# Altium PCB pay-motors-prototype.PcbDoc (part 2 of 2)
Units mm, origin at the board's own origin, x right, y up, seen from the top; angles counter-clockwise.
Board outline 81 x 46.01 mm, 4 copper layers (Top Layer, GND, PWR, Bottom Layer), stack 0.778 mm thick; 77 components, 99 nets, 310 pads, 335 vias.
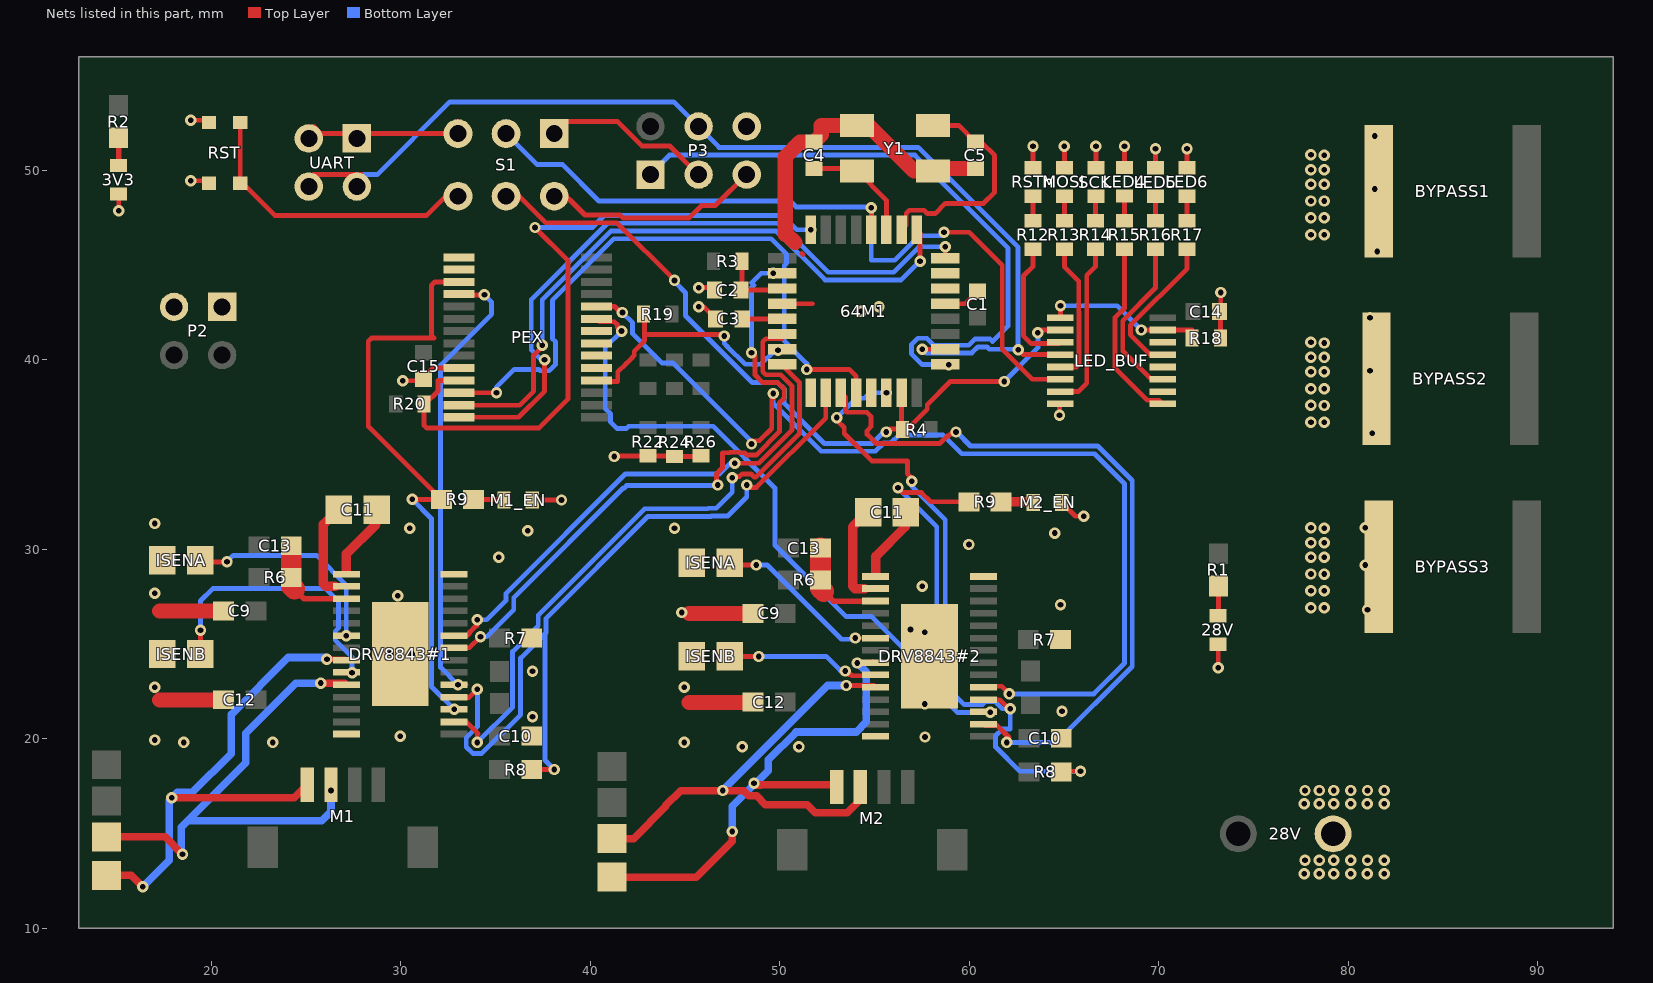
[diagram p4: the nets of this part, all layers, seen from the top]

## Via types
v1: diameter 0.6, hole 0.3, Top Layer to Bottom Layer, tented both sides, 334 vias
v2: diameter 0.6, hole 0.3, Top Layer to Bottom Layer, tented top, 1 vias

## Nets (pads, with @x,y where several pads share a name; then routed paths per layer and width w, separated by ;. In a path a pad name is that pad's centre, name@x,y a point inside that pad or via, vN(x,y) a via of type N, cw(c..) or ccw(c..) an arc to the next point about the centre after c; other vN are vias at no path point) (continued)
BIN1_DRV8843N1: 64M1.18 DRV8843#1.22 | length 34
  Top Layer w0.254: DRV8843#1.22@32.817,24.808 33.625,24.808 v1(34.211,25.394) ; v1(46.736,33.401) 46.665,33.472 46.665,33.985 46.983,34.303 46.983,35.102 47.364,35.102 47.385,35.123 47.865,35.123 47.886,35.102 48.152,35.102 48.274,34.981 48.754,34.981 49.987,36.214 49.987,37.738 50.236,37.987 50.236,38.467 49.896,38.807 49.099,38.807 48.698,39.209 48.698,40.202 v1(48.514,40.386)
  Bottom Layer w0.254: v1(34.211,25.394) 34.538,25.394 35.966,26.822 35.966,27.455 41.756,33.244 41.812,33.244 41.91,33.342 41.91,33.376 46.562,33.376 46.609,33.329 46.681,33.401 v1(46.736,33.401) ; v1(48.514,40.386) 48.514,43.815 48.641,43.942 48.514,44.069 49.022,44.577 v1(49.657,44.577)
BIN2_DRV8843N1: 64M1.22 DRV8843#1.23 | length 29.9
  Top Layer w0.254: DRV8843#1.23@32.817,25.443 33.497,25.443 33.632,25.578 33.632,25.634 33.971,25.974 34.028,25.974 34.036,25.982 v1(34.036,26.289) ; v1(47.625,34.544) 48.892,34.544 50.643,36.295 50.643,38.635 50.065,39.214 49.268,39.214 49.104,39.377 49.104,40.159 49.113,40.168 49.104,40.177 49.104,40.959 49.268,41.122 50.133,41.122 64M1.22@50.133,41.368
  Bottom Layer w0.254: v1(34.036,26.289) 34.544,26.289 35.56,27.305 35.56,27.686 41.854,33.98 46.819,33.98 47.382,34.544 v1(47.625,34.544)
BOUT1_DRV8843N1: DRV8843#1.10 M1.3 pad.2@14.478,14.826 | length 27.5
  Top Layer w0.152: DRV8843#1.10@27.035,22.944 DRV8843#1.10@27.127,22.852
  Top Layer w0.254: pad.2@14.478,14.224 pad.2@14.492,14.224
  Top Layer w0.4: pad.2@14.478,14.826 17.559,14.826 v1(18.479,13.906) ; v1(25.781,22.944) DRV8843#1.10@27.035,22.944
  Bottom Layer w0.4: v1(18.479,13.906) 18.415,13.97 18.415,15.335 18.756,15.676 ; v1(25.781,22.944) 24.468,22.944 21.827,20.303 21.827,18.746 21.082,18.002 19.05,15.97 18.756,15.676 ; v1(26.319,17.272) 26.319,16.159 25.836,15.676 21.336,15.676 18.756,15.676
BOUT1_DRV8843N2: DRV8843#2.10 M2.3 pad.2@41.148,14.732 | length 26
  Top Layer w0.254: v1(53.514,22.817) 54.975,22.817 DRV8843#2.10@55.067,22.725
  Top Layer w0.4: pad.2@41.148,14.732 42.291,14.732 43.998,16.439 43.998,16.496 44.774,17.272 v1(46.997,17.272) 48.099,17.272 48.374,16.997 48.779,16.997 49.244,16.533 51.455,16.533 51.885,16.104 53.569,16.104 54.259,16.794 M2.3@54.259,17.45
  Bottom Layer w0.4: v1(46.997,17.272) v1@47,17.275 ; v1@46.997,17.278 52.537,22.817 v1(53.514,22.817)
BOUT2_DRV8843N1: DRV8843#1.8 M1.4 pad.2@14.478,12.794 | length 28.5
  Top Layer w0.152: DRV8843#1.8@27.052,24.205 27.061,24.214 DRV8843#1.8@27.127,24.147
  Top Layer w0.3: v1(26.104,24.205) DRV8843#1.8@27.052,24.205
  Top Layer w0.4: pad.2@14.478,12.794 15.781,12.794 v1(16.383,12.192) ; v1(17.907,16.891) 21.463,16.891 23.367,16.891 24.383,16.891 M1.4@25.069,17.577
  Bottom Layer w0.4: v1(16.383,12.192) 17.78,13.589 17.78,16.764 v1(17.907,16.891) 18.199,17.183 19,17.183 21.044,19.227 21.044,21.284 24.054,24.295 26.014,24.295 v1(26.104,24.205)
BOUT2_DRV8843N2: DRV8843#2.8 M2.4 pad.2@41.148,12.7 | length 27.5
  Top Layer w0.3: v1(54.102,24.003) 54.839,24.003 DRV8843#2.8@54.914,24.078
  Top Layer w0.4: pad.2@41.148,12.7 45.593,12.7 47.498,14.605 v1(47.498,15.113) ; v1(48.641,17.653) 48.698,17.653 48.802,17.55 49.008,17.55 49.035,17.577 52.882,17.577 M2.4@53.009,17.45 ; M2.4@53.009,17.086 M2.4@53.009,17.45 ; M2.4@53.009,17.577 M2.4@53.009,17.45
  Bottom Layer w0.4: v1(47.498,15.113) 47.498,16.434 48.641,17.577 v1@48.641,17.596 ; v1(48.641,17.653) v1@48.641,17.596 ; v1@54.044,23.935 54.102,23.993 v1(54.102,24.003) 54.119,24.003 54.575,23.548 54.575,20.893 54.042,20.361 50.862,20.361 49.397,18.896 49.397,18.313 48.66,17.577 v1@48.641,17.596
CP1_DRV8843N1: C11.1@28.725,32.098 DRV8843#1.1 | length 3.8
  Top Layer w0.5: 27.127,28.923 27.127,29.761 28.686,31.32 C11.1@28.686,32.098
CP1_DRV8843N2: C11.1@56.665,31.971 DRV8843#2.1 | length 3.8
  Top Layer w0.5: 55.067,28.796 55.067,29.634 56.626,31.193 C11.1@56.626,31.971
CP2_DRV8843N1: C11.2@26.725,32.098 DRV8843#1.2 | length 4.9
  Top Layer w0.5: DRV8843#1.2@26.543,28.059 26.035,28.059 25.908,28.186 25.908,31.32 C11.2@26.686,32.098
CP2_DRV8843N2: C11.2@54.665,31.971 DRV8843#2.2 | length 4.9
  Top Layer w0.5: DRV8843#2.2@54.483,27.932 53.975,27.932 53.848,28.059 53.848,31.193 C11.2@54.626,31.971
DECAY_DRV8843N1: DRV8843#1.19 PEX.4 | length 24.7
  Top Layer w0.254: DRV8843#1.19@32.817,22.852 33.457,22.852 33.457,22.86 v1(33.02,22.86) ; PEX.4@33.071,43.479 33.116,43.434 v1(34.417,43.434)
  Bottom Layer w0.254: v1(33.02,22.86) 32.106,23.774 32.106,39.726 34.798,42.418 34.798,43.053 v1(34.417,43.434)
DECAY_DRV8843N2: DRV8843#2.19 PEX.24 | length 54.2
  Top Layer w0.254: PEX.24@40.335,42.819 41.296,42.819 41.613,42.501 v1(41.7,42.501) ; v1(48.514,35.56) 48.687,35.733 48.932,35.733 49.581,36.382 49.581,37.906 49.657,37.982 v1(49.657,38.227) ; DRV8843#2.19@60.757,22.725 60.813,22.781 61.714,22.781 v1(62.123,22.372)
  Bottom Layer w0.254: v1(41.7,42.501) 42.235,41.966 42.235,41.381 43.774,39.843 44.358,39.843 48.514,35.687 v1(48.514,35.56) ; v1(49.657,38.227) 49.657,37.714 52.187,35.184 55.052,35.184 55.484,35.616 55.866,35.616 56.28,36.03 58.633,36.03 59.611,35.052 66.615,35.052 68.199,33.468 68.199,23.988 66.583,22.372 v1(62.123,22.372)
FAULTn_DRV8843N1: 64M1.26 DRV8843#1.18 R8.1@36.918,18.382 | length 43.7
  Top Layer w0.254: DRV8843#1.18@32.817,22.192 33.607,22.192 v1(34.036,22.621) ; R8.1@36.918,18.382 R8.1@36.918,18.382 v1(38.099,18.383) ; v1(48.26,33.401) 48.387,33.274 48.772,33.274 52.43,36.932 52.43,38.264 64M1.26@52.433,38.268
  Bottom Layer w0.254: v1(34.036,22.621) 34.058,22.598 34.058,20.661 33.457,20.059 33.457,19.572 33.796,19.233 34.276,19.233 36.322,21.279 36.322,24.267 37.614,25.559 ; v1(38.099,18.383) 37.614,18.867 37.614,25.559 ; v1(48.26,33.401) 48.26,32.766 47.257,31.763 46.398,31.763 46.371,31.736 43.043,31.736 37.668,26.361 37.668,25.613 37.614,25.559
FAULTn_DRV8843N2: 64M1.30 DRV8843#2.18 R8.1@64.858,18.255 | length 35.2
  Top Layer w0.254: v1(53.009,36.957) 53.012,36.957 53.012,36.774 53.072,36.774 53.411,36.435 53.411,36.117 54.858,34.671 56.744,34.671 56.744,33.995 56.967,33.771 v1(56.967,33.599) ; DRV8843#2.18@60.757,22.065 61.611,22.065 62.087,21.588 v1(62.167,21.588) ; R8.1@64.858,18.255 64.891,18.288 v1(65.88,18.288)
  Bottom Layer w0.254: v1(53.009,36.957) 54.033,37.981 54.472,37.981 54.758,38.268 v1(55.633,38.268) ; v1(56.967,33.599) 56.967,33.334 56.965,33.332 58.733,31.564 58.733,22.817 59.745,21.806 60.699,21.806 60.872,21.979 61.352,21.979 61.743,21.588 v1(62.167,21.588) 62.167,20.518 61.736,20.518 61.397,20.179 61.397,19.572 62.681,18.288 v1(65.88,18.288)
GND: 3V3.2 28V.2 64M1.5 64M1.20 BYPASS1.2 BYPASS2.2 BYPASS3.2 C1.1 C2.1 C3.2 C4.1 C5.1 C9.2 C10.2 C12.2 C14.1 C15.1 DRV8843#1.14 DRV8843#1.28 DRV8843#1.29 DRV8843#2.14 DRV8843#2.28 DRV8843#2.29 ISENA.2 ISENB.2 LED4.2 LED5.2 LED6.2 LED_BUF.8 M1_EN.2 M2_EN.2 MOSI.2 P2.1 P2.3 P3.6 PEX.10 R7.1 R18.1 R22.1 R24.1 R26.1 RST.2 RSTn.2 SCK.2 Y1.2 Y1.4 | length 61
  Top Layer w0.254: v1(15.113,47.879) 3V3.2@15.113,48.762 ; v1(18.923,49.461) 19.869,49.461 RST.2@19.876,49.454 ; v1(18.923,52.654) RST.2@19.876,52.654 ; v1(30.099,38.898) C15.1@31.024,38.898 ; C15.1@31.209,38.979 31.129,38.898 C15.1@31.024,38.898 ; PEX.10@33.071,39.568 31.694,39.568 C15.1@31.024,38.898 ; M1_EN.2@36.945,32.606 v1(38.481,32.606) ; v1(41.275,34.906) 41.306,34.937 R22.1@43.053,34.937 44.419,34.937 R24.1@44.45,34.906 45.816,34.906 R26.1@45.847,34.937 ; v1(45.72,43.815) 46.19,43.815 46.308,43.934 C2.1@46.558,43.684 ; v1(45.728,42.799) 45.989,42.799 C3.2@46.62,42.168 ; 64M1.20@50.133,42.968 51.731,42.968 ; 51.163,45.633 51.226,45.569 ; 64M1.5@58.733,42.968 59.794,42.968 C1.1@60.452,43.626 ; RSTn.2@63.373,50.141 v1(63.373,51.273) ; v1(64.77,37.084) 64.77,37.63 LED_BUF.8@64.819,37.679 ; M2_EN.2@64.885,32.479 65.614,31.75 v1(66.04,31.75) ; MOSI.2@65.024,50.141 v1(65.024,51.273) ; SCK.2@66.69,50.141 v1(66.69,51.273) ; LED4.2@68.199,50.153 v1(68.199,51.273) ; LED5.2@69.835,50.141 v1(69.835,51.146) ; LED6.2@71.501,50.141 v1(71.501,51.146) ; 28V.2@73.144,24.998 73.144,23.757 v1(73.152,23.749) ; R18.1@73.267,41.148 73.267,42.495 C14.1@73.217,42.545 73.046,42.716 73.279,42.949 v1(73.279,43.561)
  Top Layer w0.8: 17.284,22.053 C12.2@20.652,22.053 ; 17.284,26.752 C9.2@20.652,26.752 ; 45.224,21.926 C12.2@48.592,21.926 ; 45.224,26.625 C9.2@48.592,26.625 ; 50.806,46.195 50.372,46.63 50.292,46.63 50.292,50.712 51.08,51.5 C4.1@51.816,51.5 52.197,51.881 52.197,52.377 Y1.2@54.083,52.377 54.684,52.377 57.084,49.977 Y1.4@58.083,49.977 58.207,50.1 C5.1@60.325,50.1
  other v1: 77.687,12.887 78.482,12.887 79.248,12.887 80.133,12.887 81.018,12.887 81.911,12.887 77.724,13.589 78.486,13.589 79.248,13.589 80.137,13.589 81.022,13.589 81.915,13.589 77.687,16.57 78.482,16.57 79.248,16.57 80.133,16.57 81.018,16.57 81.911,16.57 77.724,17.272 78.486,17.272 79.248,17.272 80.137,17.272 81.022,17.272 81.915,17.272 48.02,19.591 51.015,19.591 18.542,19.812 23.241,19.812 44.958,19.812 17.018,19.939 57.672,20.099 29.972,20.134 36.957,21.176 64.897,21.463 57.658,21.844 17.018,22.725 44.958,22.725 36.957,23.562 30.607,24.478 29.464,24.511 57.66,25.619 56.907,25.769 44.831,26.67 81.026,26.811 78.038,26.924 78.74,26.92 64.821,27.084 29.845,27.559 17.018,27.686 78.038,27.817 78.74,27.813 57.531,28.059 78.038,28.702 78.74,28.698 80.899,29.173 35.179,29.587 78.038,29.587 78.74,29.587 59.987,30.259 78.038,30.353 78.74,30.349 64.516,30.861 36.703,30.988 30.48,31.111 44.45,31.115 78.74,31.111 78.038,31.148 80.899,31.144 17.018,31.369 81.28,36.133 78.038,36.707 78.74,36.703 78.038,37.6 78.74,37.596 78.038,38.485 78.74,38.481 78.038,39.37 78.74,39.37 81.153,39.435 78.038,40.136 78.74,40.132 78.74,40.894 78.038,40.931 81.153,42.229 54.306,42.568 55.245,42.799 81.534,45.72 78.038,46.613 78.74,46.609 78.038,47.506 78.74,47.502 78.038,48.391 78.74,48.387 81.407,49.022 78.038,49.276 78.74,49.276 78.038,50.042 78.74,50.038 78.74,50.8 78.038,50.837 81.407,51.816
ISENA_DRV8843N1: DRV8843#1.6 ISENA.1@19.415,29.431 | length 11.2
  Top Layer w0.254: ISENA.1@19.415,29.431 19.503,29.343 v1(20.828,29.343)
  Bottom Layer w0.254: v1(20.828,29.343) 21.17,29.685 25.56,29.685 27.127,28.118 v1(27.127,25.443)
ISENA_DRV8843N2: DRV8843#2.6 ISENA.1@47.355,29.304 | length 9.4
  Top Layer w0.152: v1(53.993,25.322) 55.007,25.322 55.034,25.295 55.061,25.322 DRV8843#2.6@55.067,25.316
  Top Layer w0.254: ISENA.1@47.355,29.304 47.482,29.177 v1(48.768,29.177)
  Bottom Layer w0.254: v1(48.768,29.177) 49.346,29.177 53.262,25.26 53.931,25.26 v1(53.993,25.322)
ISENB_DRV8843N1: DRV8843#1.9 ISENB.1@19.415,24.478 | length 14.8
  Top Layer w0.254: ISENB.1@19.415,24.478 19.431,24.494 v1(19.431,25.728)
  Bottom Layer w0.254: v1(19.431,25.728) 19.431,27.281 20.082,27.932 26.035,27.932 26.721,27.246 26.721,25.856 26.548,25.683 26.548,25.203 27.432,24.319 v1(27.432,23.495)
ISENB_DRV8843N2: DRV8843#2.9 ISENB.1@47.355,24.351 | length 8.2
  Top Layer w0.254: ISENB.1@47.355,24.351 v1(48.895,24.351) ; v1(53.46,23.581) 53.474,23.581 53.659,23.396 53.754,23.396 53.816,23.335 55.016,23.335 DRV8843#2.9@55.067,23.385
  Bottom Layer w0.152: v1@53.213,23.589 53.22,23.581 v1(53.46,23.581)
  Bottom Layer w0.254: v1(48.895,24.351) 52.451,24.351 v1@53.213,23.589
LED1: R12.1 RSTn.1 | length 1.3
  Top Layer w0.254: R12.1@63.373,47.347 RSTn.1@63.373,48.641
LED2: MOSI.1 R13.1 | length 1.3
  Top Layer w0.254: R13.1@65.024,47.347 MOSI.1@65.024,48.641
LED3: R14.1 SCK.1 | length 1.3
  Top Layer w0.254: R14.1@66.675,47.347 66.675,48.626 SCK.1@66.69,48.641
LED4: LED4.1 R15.1 | length 1.3
  Top Layer w0.254: R15.1@68.199,47.347 LED4.1@68.199,48.653
LED5: LED5.1 R16.1 | length 1.3
  Top Layer w0.254: R16.1@69.835,47.347 LED5.1@69.835,48.641
LED6: LED6.1 R17.1 | length 1.3
  Top Layer w0.254: R17.1@71.501,47.347 LED6.1@71.501,48.641
LED_EN: LED_BUF.1 LED_BUF.15 R18.2 | length 8.5
  Top Layer w0.254: LED_BUF.1@64.819,42.229 v1(64.819,42.86) ; v1(69.088,41.579) LED_BUF.15@70.219,41.579 71.767,41.579 R18.2@71.767,41.148
  Bottom Layer w0.254: v1(64.819,42.86) 67.807,42.86 v1(69.088,41.579)
MISO: 64M1.8 PEX.14 | length 36.1
  Top Layer w0.254: PEX.14@33.071,36.977 36.215,36.977 37.592,38.354 v1(37.592,40.005) ; 64M1.8@58.733,45.368 v1(58.733,45.974)
  Bottom Layer w0.254: v1(37.592,40.005) 37.408,40.005 36.886,40.527 36.886,43.183 40.912,47.209 49.987,47.209 52.564,44.633 56.013,44.633 57.354,45.974 v1(58.733,45.974)
MISO_A: 64M1.1 P3.1 | length 34.7
  Top Layer w0.254: 64M1.1@58.733,39.768 58.661,39.841 58.571,39.751 v1(58.928,39.751)
  Bottom Layer w0.254: P3.1@43.155,49.784 44.185,50.813 57.14,50.813 62.056,45.897 62.056,41.794 61.237,40.974 61.114,41.097 60.298,41.097 59.977,40.776 58.143,40.776 57.771,41.147 57.291,41.147 56.952,40.808 56.952,40.328 57.529,39.751 v1(58.928,39.751)
MOSI: 64M1.9 PEX.13 | length 33.9
  Top Layer w0.254: PEX.13@33.071,37.612 36.272,37.612 37.013,38.352 37.013,40.245 37.465,40.697 v1(37.465,40.767) ; 64M1.9@57.233,46.868 57.41,46.691 v1(57.41,45.21)
  Bottom Layer w0.254: v1(37.465,40.767) 37.465,43.187 41.08,46.803 49.819,46.803 52.395,44.226 56.415,44.226 57.4,45.21 v1(57.41,45.21)
MOSI_A/TX: 64M1.2 LED_BUF.4 P3.4 UART.2 UART.4 | length 56.2
  Top Layer w0.254: UART.4@25.4,49.784 UART.2@27.94,49.784 ; v1(57.531,40.568) 64M1.2@58.733,40.568 ; v1(62.584,40.54) 62.845,40.279 LED_BUF.4@64.819,40.279
  Bottom Layer w0.254: UART.2@27.94,49.784 28.753,49.784 32.589,53.619 44.4,53.619 46.799,51.22 57.309,51.22 62.584,45.945 v1(62.584,40.54) 62.556,40.568 61.068,40.568 60.946,40.69 60.466,40.69 60.145,40.369 57.73,40.369 v1(57.531,40.568)
NetC2_2: 64M1.19 C2.2 R3.1 | length 3.7
  Top Layer w0.254: C2.2@47.958,43.684 50.049,43.684 64M1.19@50.133,43.768 ; R3.1@48.008,45.208 48.008,43.802 C2.2@48.043,43.768
NetC3_1: 64M1.21 C3.1 | length 2.1
  Top Layer w0.254: C3.1@48.02,42.168 64M1.21@50.133,42.168
NetD1_1: 28V.1@73.144,26.498 R1.1 | length 1.6
  Top Layer w0.254: 28V.1@73.144,26.498 73.152,26.505 R1.1@73.152,28.073
NetD2_1: 3V3.1 R2.1 | length 1.5
  Top Layer w0.3: 3V3.1@15.113,50.262 R2.1@15.113,51.728
NetD3_DRV8843N1_1: M1_EN.1 R9.1@33.845,32.639 | length 1.6
  Top Layer w0.254: R9.1@33.845,32.639 35.412,32.639 M1_EN.1@35.445,32.606
NetD3_DRV8843N2_1: M2_EN.1 R9.1@61.687,32.512 | length 1.7
  Top Layer w0.508: R9.1@61.687,32.512 63.352,32.512 M2_EN.1@63.385,32.479
NetS1_6: RST.1 S1.6 | length 16.1
  Top Layer w0.254: RST.1@21.526,52.654 RST.1@21.526,52.527 21.526,49.454 23.355,47.625 31.369,47.625 S1.6@33.02,49.276
NetU1_6: 64M1.6
NetU1_7: 64M1.7
NetU1_25: 64M1.25
NetU1_29: 64M1.29
NetU3_10: LED_BUF.10
NetU3_12: LED_BUF.12
NetU3_14: LED_BUF.14
NetU4_1: PEX.1
NetU4_2: PEX.2
NetU4_19: PEX.19
NetU4_20: PEX.20
NetU4_21: PEX.21
NetU4_22: PEX.22
OUT1: LED_BUF.3 R12.2 | length 6.9
  Top Layer w0.254: R12.2@63.373,45.847 63.373,44.938 62.865,44.43 62.865,41.275 63.278,40.862 64.752,40.862 LED_BUF.3@64.819,40.929
OUT2: LED_BUF.5 R13.2 | length 7.4
  Top Layer w0.254: LED_BUF.5@64.819,39.629 65.664,39.629 65.798,39.763 65.798,42.532 65.786,42.544 65.786,44.161 65.024,44.923 R13.2@65.024,45.847
OUT3: LED_BUF.7 R14.2 | length 8.8
  Top Layer w0.254: LED_BUF.7@64.819,38.329 65.761,38.329 66.205,38.773 66.205,44.468 66.675,44.938 R14.2@66.675,45.847
OUT4: LED_BUF.9 R15.2 | length 9.8
  Top Layer w0.254: R15.2@68.199,45.847 68.199,42.739 67.696,42.236 67.696,39.582 69.403,37.874 70.023,37.874 LED_BUF.9@70.219,37.679
OUT5: LED_BUF.11 R16.2 | length 8.8
  Top Layer w0.254: R16.2@69.835,45.847 69.835,43.8 68.102,42.067 68.102,40.475 69.599,38.979 LED_BUF.11@70.219,38.979
OUT6: LED_BUF.13 R17.2 | length 7.9
  Top Layer w0.254: LED_BUF.13@70.219,40.279 69.569,40.279 68.509,41.339 68.509,41.819 71.501,44.811 R17.2@71.501,45.847
PEX_CS: 64M1.16 PEX.11 R20.1 | length 37.1
  Top Layer w0.254: PEX.11@33.071,38.907 31.966,38.907 31.966,38.354 31.291,37.679 R20.1@31.23,37.679 31.23,36.545 31.369,36.406 37.295,36.406 38.824,37.935 38.824,45.25 v1(37.084,46.99) ; 64M1.16@51.562,46.939 v1(51.633,46.868)
  Bottom Layer w0.254: v1(37.084,46.99) 40.118,46.99 40.753,47.625 49.911,47.625 49.92,47.616 50.156,47.616 50.903,46.868 v1(51.633,46.868)
PEX_RSTn: 64M1.23 PEX.18 R19.1 | length 13.7
  Top Layer w0.254: PEX.18@40.335,38.862 41.458,38.862 41.458,39.37 41.894,39.807 41.896,39.807 42.235,40.146 42.235,40.148 42.324,40.236 42.324,40.459 42.873,41.008 42.873,41.334 ; R19.1@42.811,42.418 42.873,42.356 42.873,41.334 ; v1(47.071,41.266) 47.116,41.266 47.185,41.334 42.873,41.334
  Bottom Layer w0.254: v1(47.071,41.266) 47.071,40.875 47.244,40.702 48.178,39.768 49.011,39.768 49.757,40.513 v1(49.911,40.513)
PROG_RST: P3.5 S1.4 | length 11.8
  Top Layer w0.254: S1.4@38.1,49.276 39.726,47.65 41.57,47.65 41.723,47.498 45.224,47.498 45.878,48.151 46.603,48.151 P3.5@48.235,49.784
RESETn_DRV8843N1: 64M1.24 DRV8843#1.16 | length 32.4
  Top Layer w0.254: DRV8843#1.16@32.817,20.896 33.466,20.896 34.093,20.269 34.036,20.211 v1(34.036,19.812) ; v1(47.498,33.782) 47.569,33.853 47.893,33.853 48.02,33.98 48.5,33.98 48.666,33.814 48.737,33.814 51.049,36.126 51.049,38.804 50.133,39.719 64M1.24@50.133,39.768
  Bottom Layer w0.254: v1(34.036,19.812) 35.902,21.678 35.902,24.607 37.262,25.967 37.262,26.536 42.868,32.142 46.203,32.142 46.23,32.169 46.647,32.169 47.498,33.02 v1(47.498,33.782)
RESETn_DRV8843N2: 64M1.27 DRV8843#2.16 | length 39.3
  Top Layer w0.254: 64M1.27@53.233,38.268 53.479,38.022 53.479,37.306 53.547,37.239 54.602,37.239 54.816,37.024 54.816,36.471 54.61,36.265 54.61,36.068 55.09,35.588 58.442,35.588 58.834,35.98 58.873,35.941 59.127,36.195 v1(59.309,36.195) ; DRV8843#2.16@60.757,20.769 60.828,20.698 61.352,20.698 61.415,20.76 62.103,20.072 61.976,19.945 v1(61.976,19.812)
  Bottom Layer w0.254: v1(59.309,36.195) v1@59.334,36.195 ; v1@59.436,36.297 v1@59.334,36.195 ; v1(61.976,19.812) 64.597,19.812 68.605,23.82 68.605,33.636 66.783,35.458 60.071,35.458 v1@59.334,36.195
RSTn: 64M1.31 LED_BUF.2 R4.1 S1.5 | length 40.9
  Top Layer w0.254: S1.5@35.56,49.276 35.617,49.276 37.649,47.244 41.402,47.244 v1(44.45,44.196) ; v1(55.626,36.195) 55.791,36.36 R4.1@56.433,36.36 ; 64M1.31@56.433,38.268 R4.1@56.433,36.36 ; v1(61.849,38.862) 59.007,38.862 57.788,37.643 57.788,37.402 56.703,36.318 R4.1@56.476,36.318 R4.1@56.433,36.36 ; v1@63.804,41.579 LED_BUF.2@64.819,41.579
  Bottom Layer w0.254: v1(44.45,44.196) 44.45,44.126 45.029,43.547 45.029,42.342 48.565,38.806 49.897,38.806 50.236,38.467 50.236,37.987 50.233,37.984 50.233,37.713 52.356,35.59 54.884,35.59 55.489,36.195 v1(55.626,36.195) ; v1(61.849,38.862) 63.627,40.64 v1(63.627,41.441)
RX: S1.3 UART.1 UART.3 | length 8
  Top Layer w0.254: UART.3@25.4,52.324 25.781,51.943 32.385,51.943 S1.3@33.02,52.578
SCK: 64M1.28 PEX.12 | length 33.7
  Top Layer w0.254: PEX.12@33.071,38.272 33.116,38.227 33.161,38.272 v1(35.052,38.272) ; v1(51.435,39.497) 53.671,39.497 54.033,39.135 64M1.28@54.033,38.268
  Bottom Layer w0.254: v1(35.052,38.272) 35.052,38.554 35.995,39.497 37.281,39.497 37.352,39.426 37.832,39.426 38.171,39.765 38.171,40.952 38.003,41.121 38.003,43.151 41.249,46.396 49.546,46.396 50.363,45.579 50.363,45.099 50.241,44.977 50.241,41.002 51.435,39.808 v1(51.435,39.497)
SCK_A: P3.3 S1.1 | length 8.8
  Top Layer w0.254: S1.1@38.1,52.578 41.445,52.578 42.729,51.295 44.185,51.295 P3.3@45.695,49.784
SCK_A/RX: 64M1.12 LED_BUF.6 S1.2 | length 42.3
  Top Layer w0.254: 64M1.12@54.833,46.868 v1(54.833,48.037) ; v1(58.674,46.736) 60.001,46.736 61.743,44.995 61.743,40.562 63.326,38.979 LED_BUF.6@64.819,38.979
  Bottom Layer w0.254: S1.2@35.56,52.578 S1.2@35.56,51.943 37.186,50.317 38.531,50.317 40.462,48.387 50.55,48.387 50.863,48.074 54.796,48.074 v1(54.833,48.037) 54.833,45.26 56.065,45.26 57.359,46.553 58.678,46.553 58.86,46.736 v1(58.674,46.736)
SLEEPn_DRV8843N1: DRV8843#1.17 PEX.3 R9.2@32.145,32.639 | length 31.4
  Top Layer w0.254: v1(30.607,32.639) R9.2@32.145,32.639 28.29,36.494 28.29,40.99 28.456,41.156 31.75,41.156 31.623,41.283 31.623,43.942 31.795,44.114 PEX.3@33.071,44.114
  Bottom Layer w0.254: v1(30.607,32.639) 31.623,31.623 31.623,22.75 v1(32.817,21.557)
SLEEPn_DRV8843N2: DRV8843#2.17 PEX.23 R9.2@59.987,32.512 | length 51.2
  Top Layer w0.254: PEX.23@40.335,42.158 40.475,42.019 41.276,42.019 41.44,41.855 41.44,41.739 v1(41.656,41.523) ; v1(56.244,33.257) 56.502,33 57.48,33 57.968,32.512 R9.2@59.987,32.512 ; DRV8843#2.17@60.757,21.43 61.082,21.43 v1(61.112,21.399)
  Bottom Layer w0.254: v1(41.656,41.523) 40.792,40.66 40.792,37.434 41.077,37.15 41.077,36.717 41.416,36.378 41.896,36.378 42.023,36.505 46.484,36.505 49.753,33.235 49.753,30.215 53.514,26.454 54.859,26.454 58.293,23.02 ; v1(56.244,33.257) 56.134,33.147 56.331,33.147 58.293,31.185 58.293,23.02 ; v1(61.112,21.399) 59.373,21.399 58.293,22.479 58.293,23.02
VCP_DRV8843N1: C13.2@24.218,30.193 DRV8843#1.3 R6.2@24.218,28.522 | length 5.2
  Top Layer w0.3: 24.384,27.907 24.892,27.399 DRV8843#1.3@27.127,27.399
  Top Layer w1.1: C13.2@24.218,30.054 R6.2@24.218,28.522 24.218,28.073 24.384,27.907
VCP_DRV8843N2: C13.2@52.158,30.066 DRV8843#2.3 R6.2@52.158,28.395 | length 5.3
  Top Layer w0.3: 52.324,27.78 52.832,27.272 DRV8843#2.3@55.067,27.272
  Top Layer w1.1: C13.2@52.158,30.066 R6.2@52.158,28.395 52.158,27.946 52.324,27.78
XTAL1: 64M1.10 C5.2 Y1.1 | length 12.1
  Top Layer w0.254: 64M1.10@56.433,46.868 56.679,47.114 56.679,47.734 56.843,47.897 57.624,47.897 57.795,47.727 58.207,47.727 58.741,48.26 60.757,48.26 61.341,48.844 61.341,50.8 60.641,51.5 C5.2@60.325,51.5 59.448,52.377 Y1.1@58.083,52.377
XTAL2: 64M1.11 C4.2 Y1.3 | length 6.1
  Top Layer w0.254: C4.2@51.816,50.1 53.477,50.1 53.6,49.977 Y1.3@54.083,49.977 55.633,48.426 64M1.11@55.633,46.868
pads on no net: M1. M2.

## Polygon pours and split planes (outlines as drawn)
28V on PWR "28V-header" (solid, remove dead copper, pour order 77): 94,35 94,56 75,56 75,35.612 13.081,35.612 13.081,11.684 11.397,10 94,10
3V3 on PWR "3V3-layer-small" (solid, pour order 73): 69.469,35.941 74.168,35.941 74.163,55.774 12.827,56.007 12.827,35.941
no net on PWR "PWR-GND" (solid, pour order 55): 62.992,26.383
no net on PWR "PWR-GND" (solid, pour order 54): 35.052,26.51
GND on Top Layer "Top Layer-GND" (solid, remove dead copper, pour order 61): 37.465,19.431 37.465,32.004 16.002,32.004 16.002,19.431
28V on Top Layer "28V_L01_P101" (solid, pour order 101): 21.525,32.1 21.525,20.675 25.275,20.675 25.275,27.15 23.6,27.15 23.6,32.1
GND on Top Layer "Top Layer-GND" (solid, remove dead copper, pour order 105): 65.54,19.181 65.54,31.754 44.077,31.754 44.077,19.181
GND on Top Layer "Top Layer-GND-IC" (solid, remove dead copper, pour order 58): 59.69,19.259 59.69,29.546 56.134,29.546 56.134,19.259
28V on Top Layer "28V_L01_P103" (solid, pour order 103): 49.225,31.875 49.225,20.45 52.975,20.45 52.975,26.925 51.3,26.925 51.3,31.875
GND on Top Layer "Top Layer-GND 1" (solid, remove dead copper, pour order 75): 50.592,47.347 50.003,46.758 49.414,45.146 49.414,39.402 51.098,39.402 51.268,39.232 51.268,37.522 57.723,37.522 57.723,39.232 57.893,39.402 59.574,39.402 59.574,45.857 57.893,45.857 57.723,46.027 57.723,47.347
GND on Top Layer "Top Layer-GND" (solid, pour order 57): 31.75,19.431 31.75,29.431 28.194,29.431 28.194,19.431
GND on Top Layer "GND-bypass1" (solid, remove dead copper, pour order 93): 77.216,45.138 82.457,45.138 82.457,52.502 77.216,52.502
28V on Top Layer "28V-bypasscap1" (solid, remove dead copper, pour order 97): 88.646,43.942 92.202,43.942 92.202,54.102 88.646,54.102
28V on Top Layer "28V-bypasscap2" (solid, remove dead copper, pour order 95): 88.646,33.909 92.202,33.909 92.202,44.069 88.646,44.069
GND on Top Layer "28V-bypass2" (solid, remove dead copper, pour order 91): 77.216,35.181 82.423,35.181 82.423,45.72 77.216,45.72
GND on Top Layer "28V-bypass3" (solid, remove dead copper, pour order 89): 77.216,25.148 82.477,25.148 82.477,35.687 77.216,35.687
28V on Top Layer "28V-bypasscap3" (solid, remove dead copper, pour order 87): 88.577,23.876 92.202,23.876 92.202,34.036 88.577,34.036
28V on Top Layer "28V-supply-28" (solid, remove dead copper, pour order 83): 71.12,11.686 76.2,11.686 76.2,19.05 71.12,19.05
GND on Top Layer "28V-supply-GND" (solid, remove dead copper, pour order 81): 77.216,11.686 82.296,11.686 82.296,19.05 77.216,19.05
GND on GND "GND-layer" (solid, remove dead copper, pour order 67): 13,56.007 13,10 94,10 94,56.007

## Other copper
Top Layer:
  pour cut-out: 49.188,20.634 53.95,20.634 53.95,20.38 49.188,20.38
  pour cut-out: 46.101,31.877 49.124,31.877 49.124,20.193 46.101,20.193
  pour cut-out: 51.44,31.844 53.441,31.844 53.441,26.891 51.44,26.891
  pour cut-out: 60.279,28.161 64.135,28.161 64.135,17.239 60.389,17.239 60.389,19.144
  pour cut-out: 21.502,20.668 26.264,20.668 26.264,20.414 21.502,20.414
  pour cut-out: 23.5,32.098 25.501,32.098 25.501,27.145 23.5,27.145
  pour cut-out: 25.146,21.839 27.788,21.839 27.788,20.668 25.146,20.668
  pour cut-out: 25.146,26.349 27.686,26.349 27.686,22.573 25.146,22.573
  pour cut-out: 18.098,32.098 21.502,32.098 21.502,20.414 18.097,20.414
  pour cut-out: 25.501,32.098 27.686,32.098 27.686,27.018 25.501,27.018
  pour cut-out: 32.212,28.415 36.068,28.415 36.068,17.493 32.322,17.493 32.322,19.398
  pour cut-out: 36.957,19.652
  pour cut-out: 33.401,22.319

## Silkscreen, mask and mechanical layers (free items; w line width, h text height)
Top Overlay:
  lines w0.2: 43.891,48.362 44.552,47.701 47.015,47.701 ; 46.99,47.701 46.99,47.727 47.625,48.362
  lines w0.254: 42.037,41.156 42.037,34.036 46.736,34.036 ; 46.736,41.204 46.736,34.036 ; 46.736,34.036 46.736,34.036
  text "RUN<->PGM" at 31.75,54.102 h0.8
  text "PROGRAM" at 42.545,53.975 h0.8
  text "GND" at 18.542,44.323 h1 r90
  text "GND" at 21.082,44.323 h1 r90
  text "ADDR" at 42.926,40.691 h0.8
  text "1" at 47.498,38.735 h1.2
  text "3V3" at 18.542,35.814 h1 r90
  text "3V3" at 21.209,35.687 h1 r90
  text "0" at 47.371,34.906 h1.2
  text "1" at 44.311,32.512 h1.2
  text "0" at 45.517,32.512 h1.2
  text "A" at 40.767,32.479 h1.2
  text "2" at 42.672,32.479 h1.2
  text "+" at 71.374,19.591 h1.52
  text "-" at 80.391,19.591 h1.52
  text "AOUT1" at 16.383,18.161 h1
  text "AOUT1" at 42.811,17.907 h1
  text "AOUT2" at 16.129,16.51 h1
  text "AOUT2" at 42.811,16.129 h1
  text "BOUT1" at 16.256,14.605 h1
  text "BOUT1" at 42.811,14.351 h1
  text "BOUT2" at 16.129,12.7 h1
  text "BOUT2" at 42.811,12.446 h1
  text "!" at 90.551,11.811 h10 r90
  text "HERON MK II / PAY-MOTORS" at 91.948,11.811 h1 r90
Route Tool Path (Mech6):
  lines w1.6: 22.498,56.689 12.065,56.562 12.065,10.414 93.472,10.414 93.472,56.642 48.844,56.717 ; 29.337,56.769 42.037,56.769

## Text inside footprints (layer, text, board x,y; h text height)
28V: Mechanical 4 "1" at 73.058,12.336 h1.88; Mechanical 4 "1" at 73.058,12.336 h1.88
P3: Top Overlay "6" at 49.784,51.816 h1.27; Top Overlay "5" at 49.784,49.276 h1.27; Top Overlay "2" at 40.64,51.816 h1.27; Top Overlay "1" at 41.148,49.276 h1.27
UART: Top Overlay "RX" at 24.13,53.594 h1; Top Overlay "TX" at 24.13,46.355 h1; Top Overlay "TX" at 26.797,46.355 h1; Top Overlay "RX" at 27.051,53.594 h1